# Altium PCB msp430f.PcbDoc (part 2 of 2)
Units mil, origin at the board's own origin, x right, y up, seen from the top; angles counter-clockwise.
Board outline 1930 x 4050 mil, 2 copper layers (Top Layer, Bottom Layer); 52 components, 80 nets, 292 pads, 95 vias.
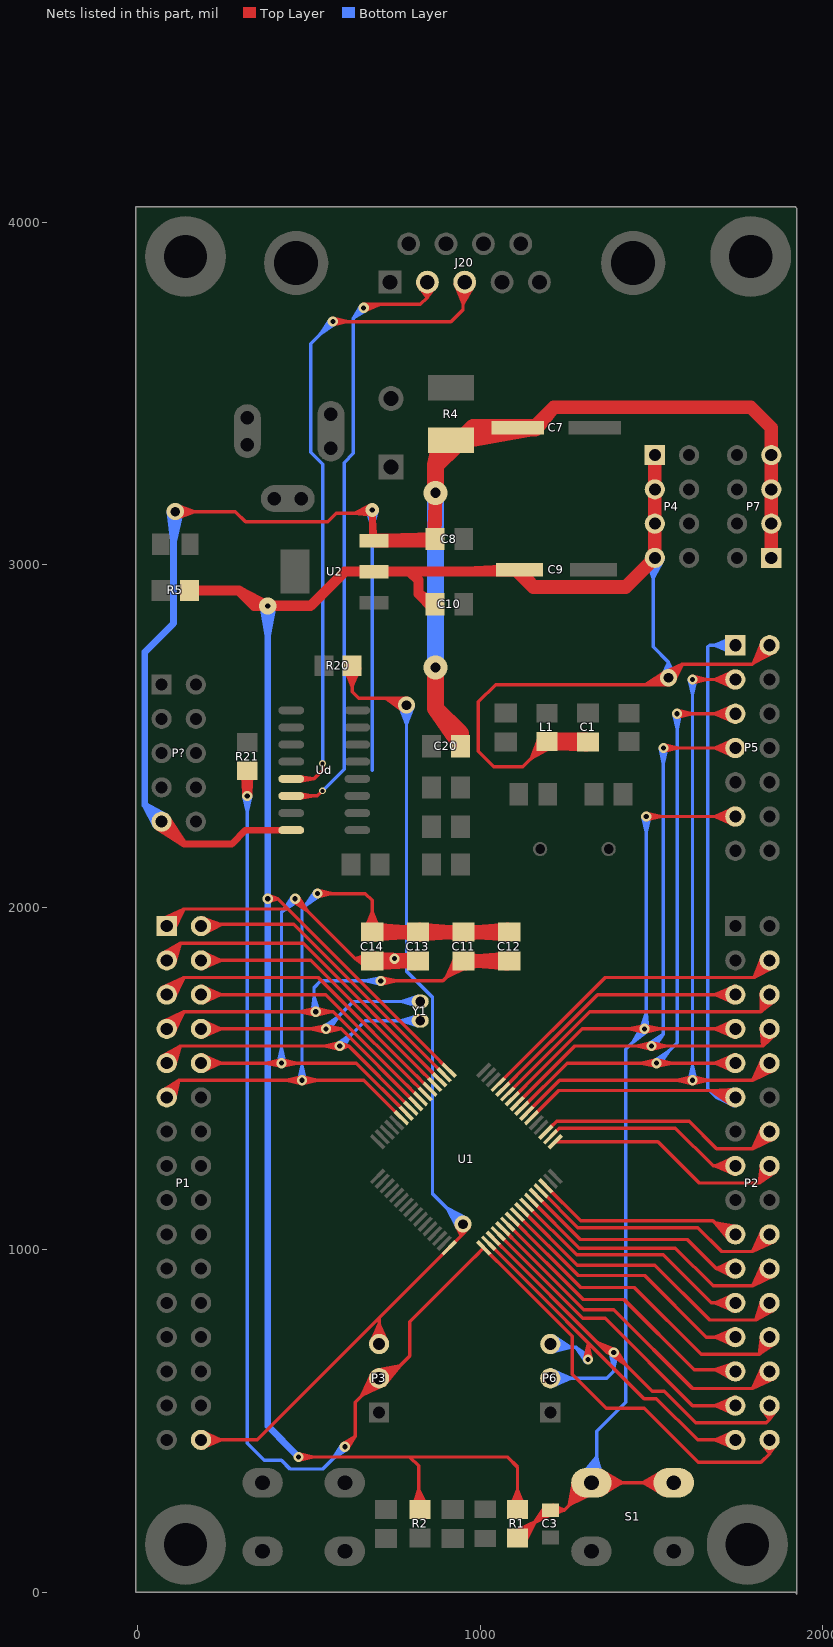
[diagram p2: the nets of this part, all layers, seen from the top]

## Via types
v1: diameter 50, hole 28, Top Layer to Bottom Layer, 43 vias
v2: diameter 30, hole 15, Top Layer to Bottom Layer, 42 vias
v3: diameter 25, hole 15, Top Layer to Bottom Layer, 3 vias
v4: diameter 70, hole 30, Top Layer to Bottom Layer, 2 vias
v5: diameter 20, hole 12, Top Layer to Bottom Layer, 2 vias
v6: diameter 40, hole 15, Top Layer to Bottom Layer, 1 vias
v7: diameter 20, hole 15, Top Layer to Bottom Layer, 1 vias
v8: diameter 50, hole 15, Top Layer to Bottom Layer, 1 vias

## Nets (pads, with @x,y where several pads share a name; then routed paths per layer and width w, separated by ;. In a path a pad name is that pad's centre, name@x,y a point inside that pad or via, vN(x,y) a via of type N, cw(c..) or ccw(c..) an arc to the next point about the centre after c; other vN are vias at no path point) (continued)
P3_4: P1.32 P3.3 R20.2 U1.32 | length 4797.3
  Top Layer w10: P1.32@185,445 244.53,445 ; P1.32@186.77,430.58 244.53,445 ; P1.32@186.77,459.42 244.53,445 ; P1.32@190.05,421 244.53,445 ; P1.32@190.05,469 244.53,445 ; P1.32@195,445 348.79,445 705,801.21 ; R20.2@604.22,2697.63 626.34,2644.49 ; R20.2@613.85,2700.68 626.34,2644.49 ; R20.2@626.34,2702.05 626.34,2644.49 ; R20.2@626.34,2705 626.34,2628.66 645,2610 765,2610 v1(785,2590) 725.09,2610 ; R20.2@638.82,2700.68 626.34,2644.49 ; R20.2@648.46,2697.63 626.34,2644.49 ; P3.3@681,730.05 705,784.53 ; P3.3@690.58,726.77 705,784.53 ; P3.3@705,725 705,801.21 ; P3.3@719.42,726.77 705,784.53 ; P3.3@729,730.05 705,784.53 ; v1@775.74,2572.27 725.09,2610 ; v1@781.09,2580.79 725.09,2610 ; v1@787.41,2599.71 725.09,2610 ; v1@788.25,2609.73 725.09,2610 ; 869.23,965.44 U1.32@894.34,990.55 ; U1.32@909.19,1005.4 705,801.21 ; U1.32@909.36,1005.57 945,1041.21 ; U1.32@924.39,1020.6 945,1041.21 ; v1@930.23,1072.01 945,1041.21 ; v1@940,1075 945,1041.21 ; v1@945,1075 945,1041.21 ; v1(950,1075) 945,1041.21 ; v1@959.57,1072.1 945,1041.21 ; v1@968.06,1066.41 945,1041.21
  Bottom Layer w10: v1@765.33,2586.36 785,2535 ; v1@775.04,2589.09 785,2535 ; v1(785,2590) 785,1813.84 861,1737.84 861,1164 v1(950,1075) ; v1@794.96,2589.09 785,2535 ; v1@804.67,2586.36 785,2535 ; v1@933.86,1063.19 903.79,1121.21 ; v1@942.41,1068.49 903.79,1121.21 ; v1@956.51,1082.59 903.79,1121.21 ; v1@961.81,1091.14 903.79,1121.21
P3_5: P2.32 P3.2 R21.2 U1.33 | length 6568.9
  Top Layer w10: R21.2@297.88,2394.24 320,2341.1 ; R21.2@307.52,2397.29 320,2341.1 ; v2@310.01,2324.67 313.5,2370.36 ; v2@310.06,2326.11 320,2370 v2@329.94,2326.11 ; v2@310.12,2323.43 307.71,2370.63 ; v2@310.32,2327.49 326.5,2370.36 ; v2@310.67,2328.61 332.29,2370.63 ; R21.2@320,2398.66 v2(320,2325) ; v2@329.33,2328.61 307.71,2370.63 ; v2@329.68,2327.49 313.5,2370.36 ; v2@329.88,2323.43 332.29,2370.63 ; v2@329.99,2324.67 326.5,2370.36 ; R21.2@332.48,2397.29 320,2341.1 ; R21.2@342.12,2394.24 320,2341.1 ; v2@598.81,432.86 635,455 ; v2(605,425) 635,455 ; v2@612.86,418.81 635,455 ; P3.2@684.95,639.12 654.26,574.26 ; P3.2@693.74,634.18 654.26,574.26 ; P3.2@696.26,647.92 766.63,661.63 ; P3.2@698.88,638.18 766.63,661.63 ; P3.2@700,620 635,555 635,455 ; P3.2@713.65,613.33 766.63,661.63 ; P3.2@714.18,613.74 654.26,574.26 ; P3.2@719.12,604.95 654.26,574.26 ; P3.2@720.95,606.37 766.63,661.63 ; 985.7,980.3 U1.33@1010.64,1005.57 ; U1.33@1025.66,990.55 1050.77,965.44 ; P2.32@1821.65,437.48 1845,405 ; P2.32@1830.71,442.36 1845,405 ; P2.32@1845,445 1845,405 ; P2.32@1859.29,442.36 1845,405 ; P2.32@1868.35,437.48 1845,405 ; 307.71,2370.63 v2(320,2325) ; v2@310.49,2328.11 320,2341.1 ; v2@310.49,2328.11 320,2341.1 ; v2@310.49,2328.11 320,2341.1 ; v2@310.49,2328.11 320,2341.1 ; 313.5,2370.36 v2(320,2325) ; v2(320,2325) 320,2341.1 ; v2(320,2325) 320,2341.1 ; v2(320,2325) 326.5,2370.36 ; v2(320,2325) 320,2341.1 ; v2(320,2325) 320,2341.1 ; v2(320,2325) 332.29,2370.63 ; 320,2341.1 v2@329.51,2328.11 ; 320,2341.1 v2@329.51,2328.11 ; 320,2341.1 v2@329.51,2328.11 ; 320,2341.1 v2@329.51,2328.11 ; 654.26,574.26 P3.2@705,625 ; P3.2@705,625 766.63,661.63 ; P3.2@705,625 730,625 795,690 795,789.6 1010.81,1005.4 1268.75,747.46 1268.75,636.25 1368.04,536.96 1479.25,536.96 1636.21,380 1820,380 1845,405
  Bottom Layer w10: v2@310.06,2323.89 320,2280 v2@329.94,2323.89 ; v2(320,2325) 320,435 370,385 420,385 445,360 540,360 v2(605,425) ; v2@597.27,431.35 568.79,388.79 v2@611.35,417.27
P3_6: P2.31 P6.3 U1.34 | length 1894.8
  Top Layer w10: U1.34@1024.73,1019.32 1478.29,565.76 1514.24,565.76 1635,445 P2.31@1745,445 ; U1.34@1039.58,1004.46 1064.69,979.36 ; v2@1305.06,681.11 1315,725 v2@1324.94,681.11 ; v2(1315,680) 1315,729.05 ; P2.31@1739.95,421 1685.47,445 ; P2.31@1739.95,469 1685.47,445 ; P2.31@1743.23,430.58 1685.47,445 ; P2.31@1743.23,459.42 1685.47,445
  Bottom Layer w10: P6.3@1204.34,710.49 1265.27,715 ; P6.3@1205,725 1265.27,715 ; P6.3@1205.92,700.49 1265.27,715 ; P6.3@1209.07,738.95 1265.27,715 ; P6.3@1210,715 1280,715 ; P6.3@1213.79,747.9 1265.27,715 ; v2@1307.25,673.68 1280,715 ; v2(1315,680) 1280,715 ; v2@1321.32,687.75 1280,715
P3_7: P2.30 P6.2 U1.35 | length 2223
  Top Layer w10: U1.35@1038.64,1033.24 1371.89,700 ; U1.35@1053.5,1018.38 1078.6,993.28 ; v2@1383.65,692.27 1426.21,663.79 v2@1397.73,706.35 ; v2@1384.01,692 1342.74,729.15 ; v2@1394.46,708.95 1342.74,729.15 ; P2.30@1821.65,537.48 1845,505 ; P2.30@1830.71,542.36 1845,505 ; P2.30@1845,545 1845,505 ; P2.30@1859.29,542.36 1845,505 ; P2.30@1868.35,537.48 1845,505 ; 1342.74,729.15 v2(1390,700) ; 1371.89,700 v2(1390,700) ; 1371.89,700 1387.24,709.61 1371.89,700 ; 1371.89,700 1387.24,690.39 1371.89,700 ; 1371.89,700 v2(1390,700) ; 1371.89,700 v2(1390,700) ; v2(1390,700) 1502.38,587.62 1537.38,587.62 1630,495 1835,495 1845,505
  Bottom Layer w10: P6.2@1205,625 1370,625 1390,645 v2(1390,700) ; P6.2@1206.77,610.58 1264.53,625 ; P6.2@1206.77,639.42 1264.53,625 ; P6.2@1210.05,601 1264.53,625 ; P6.2@1210.05,649 1264.53,625 ; v2@1380.06,698.89 1390,655 v2@1399.94,698.89
P4_0: P2.29 U1.36 | length 1174
  Top Layer w10: U1.36@1052.56,1047.16 1299.73,800 1365,800 1620,545 P2.29@1745,545 ; U1.36@1067.42,1032.3 1092.52,1007.2 ; P2.29@1739.95,521 1685.47,545 ; P2.29@1739.95,569 1685.47,545 ; P2.29@1743.23,530.58 1685.47,545 ; P2.29@1743.23,559.42 1685.47,545
P4_1: P2.28 U1.37 | length 1310.6
  Top Layer w10: U1.37@1066.48,1061.08 1302.56,825 1390,825 1620,595 1795,595 ; U1.37@1081.34,1046.22 1106.44,1021.12 ; P2.28@1824.91,659.07 1795,595 ; P2.28@1833.73,654.16 1795,595 ; P2.28@1845,645 1795,595 ; P2.28@1854.16,633.73 1795,595 ; P2.28@1859.07,624.91 1795,595
P4_2: P2.27 U1.38 | length 1171.3
  Top Layer w10: U1.38@1080.4,1075 1300.4,855 1420,855 1625,650 P2.27@1740,650 ; U1.38@1095.26,1060.14 1120.36,1035.04 ; P2.27@1738.01,621.49 1685.18,650 ; P2.27@1742.01,669.34 1685.18,650 ; P2.27@1742.05,630.78 1685.18,650 ; P2.27@1744.45,659.52 1685.18,650 ; P2.27@1745,645 1685.18,650
P4_3: P2.26 U1.39 | length 1273.3
  Top Layer w10: U1.39@1094.32,1088.92 1293.24,890 1450,890 1645,695 1815,695 ; U1.39@1109.18,1074.06 1134.28,1048.96 ; P2.26@1821.78,752.91 1815,695 ; P2.26@1831.71,750.86 1815,695 ; P2.26@1856.43,736.03 1815,695 ; P2.26@1862.91,728.24 1815,695 ; 1815,695 P2.26@1845,745 1845,725 1815,695
P4_4: P2.25 U1.40 | length 1058.6
  Top Layer w10: U1.40@1108.24,1102.84 1286.08,925 1480,925 1660,745 P2.25@1745,745 ; U1.40@1123.1,1087.98 1148.2,1062.88 ; P2.25@1739.95,721 1685.47,745 ; P2.25@1739.95,769 1685.47,745 ; P2.25@1743.23,730.58 1685.47,745 ; P2.25@1743.23,759.42 1685.47,745
P4_5: P2.24 U1.41 | length 1238.3
  Top Layer w10: U1.41@1122.16,1116.76 1283.92,955 1510,955 1670,795 1805,795 ; U1.41@1137.02,1101.9 1162.12,1076.8 ; P2.24@1823.27,856.37 1805,795 ; P2.24@1832.7,852.73 1805,795 ; P2.24@1855.24,834.7 1805,795 ; P2.24@1860.86,826.29 1805,795 ; 1805,795 P2.24@1845,845 1845,835 1805,795
P4_6: P2.23 U1.42 | length 1060.4
  Top Layer w10: U1.42@1136.08,1130.68 1281.76,985 1535,985 1675,845 P2.23@1745,845 1685.47,845 ; U1.42@1150.94,1115.82 1176.04,1090.72 ; P2.23@1739.95,821 1685.47,845 ; P2.23@1739.95,869 1685.47,845 ; P2.23@1743.23,830.58 1685.47,845 ; P2.23@1743.23,859.42 1685.47,845
P4_7: P2.22 U1.43 | length 1137.4
  Top Layer w10: U1.43@1150,1144.6 1289.6,1005 1570,1005 1680,895 1795,895 ; U1.43@1164.86,1129.74 1189.96,1104.64 ; P2.22@1824.91,959.07 1795,895 ; P2.22@1833.73,954.16 1795,895 ; P2.22@1845,945 1795,895 ; P2.22@1854.16,933.73 1795,895 ; P2.22@1859.07,924.91 1795,895
P5_0: P2.21 U1.44 | length 990
  Top Layer w10: U1.44@1163.92,1158.52 1292.44,1030 1605,1030 1690,945 ; U1.44@1178.78,1143.66 1203.88,1118.56 ; P2.21@1739.53,921.09 1690,945 ; P2.21@1739.53,968.91 1690,945 ; P2.21@1743.08,930.6 1690,945 ; P2.21@1743.08,959.4 1690,945 ; P2.21@1745,945 1690,945 ; P2.21@1755,945 1690,945
P5_1: P2.20 U1.45 | length 1079.7
  Top Layer w10: U1.45@1177.84,1172.44 1285.27,1065 1635,1065 1705,995 1795,995 ; U1.45@1192.7,1157.58 1217.8,1132.48 ; P2.20@1824.91,1059.07 1795,995 ; P2.20@1833.73,1054.16 1795,995 ; P2.20@1845,1045 1795,995 ; P2.20@1854.16,1033.73 1795,995 ; P2.20@1859.07,1024.91 1795,995
P5_2: P2.19 U1.46 | length 966.1
  Top Layer w10: U1.46@1191.76,1186.36 1293.11,1085 1679.8,1085 P2.19@1719.8,1045 ; U1.46@1206.62,1171.5 1231.72,1146.4 ; P2.19@1729.15,1026.28 1685.42,1079.38 ; P2.19@1736.45,1033.25 1685.42,1079.38 ; P2.19@1745,1045 1685.42,1079.38 ; P2.19@1750.89,1058.28 1685.42,1079.38 ; P2.19@1753.28,1068.09 1685.42,1079.38
P5_5: P2.16 U1.49 | length 1037.2
  Top Layer w10: U1.49@1219.43,1315.64 1257.21,1315.81 ; U1.49@1219.6,1315.81 1519.19,1315.81 1640,1195 1815,1195 ; P2.16@1821.78,1252.91 1815,1195 ; P2.16@1831.71,1250.86 1815,1195 ; P2.16@1856.43,1236.03 1815,1195 ; P2.16@1862.91,1228.24 1815,1195 ; 1815,1195 P2.16@1845,1245 1845,1225 1815,1195
P5_6: P2.15 U1.50 | length 848.2
  Top Layer w10: U1.50@1205.68,1329.73 1230.95,1355 ; U1.50@1220.54,1344.58 1230.95,1355 ; P2.15@1739.95,1221 1685.47,1245 ; P2.15@1739.95,1269 1685.47,1245 ; P2.15@1743.23,1230.58 1685.47,1245 ; P2.15@1743.23,1259.42 1685.47,1245 ; P2.15@1745,1245 1680,1245 1570,1355 1230.95,1355
P5_7: P2.14 U1.51 | length 1026.3
  Top Layer w10: U1.51@1191.76,1343.64 1223.11,1375 ; U1.51@1206.62,1358.5 1223.11,1375 ; P2.14@1824.91,1359.07 1795,1295 ; P2.14@1833.73,1354.16 1795,1295 ; P2.14@1845,1345 1795,1295 ; P2.14@1854.16,1333.73 1795,1295 ; P2.14@1859.07,1324.91 1795,1295 ; 1223.11,1375 1610,1375 1690,1295 1795,1295
P6_0: P2.6 U1.59 | length 1214.4
  Top Layer w10: U1.59@1080.4,1455 1320.4,1695 1820,1695 ; U1.59@1095.26,1469.86 1120.36,1494.96 ; P2.6@1821.19,1750.89 1820,1695 ; P2.6@1831.27,1749.75 1820,1695 ; P2.6@1857.04,1736.87 1820,1695 ; P2.6@1864,1729.49 1820,1695 ; 1820,1695 P2.6@1845,1745 1845,1720 1820,1695
P6_1: P2.5 U1.60 | length 1066.5
  Top Layer w10: U1.60@1066.48,1468.92 1342.56,1745 P2.5@1745,1745 ; U1.60@1081.34,1483.78 1106.44,1508.88 ; P2.5@1739.95,1721 1685.47,1745 ; P2.5@1739.95,1769 1685.47,1745 ; P2.5@1743.23,1730.58 1685.47,1745 ; P2.5@1743.23,1759.42 1685.47,1745
P6_2: P2.4 U1.61 | length 1317.2
  Top Layer w10: U1.61@1052.56,1482.84 1364.73,1795 1800,1795 ; U1.61@1067.42,1497.7 1092.52,1522.8 ; P2.4@1824.08,1857.81 1800,1795 ; P2.4@1833.22,1853.5 1800,1795 ; P2.4@1854.69,1834.17 1800,1795 ; P2.4@1859.93,1825.54 1800,1795 ; 1800,1795 P2.4@1845,1845 1845,1840 1800,1795
P6_3: P1.2 U1.2 | length 1237.7
  Top Layer w10: P1.2@175,1950 455.95,1950 U1.2@895.27,1510.68 ; P1.2@185,1945 244.78,1950 ; P1.2@185.55,1959.52 244.78,1950 ; P1.2@187.95,1930.78 244.78,1950 ; P1.2@188,1969.34 244.78,1950 ; P1.2@192,1921.49 244.78,1950 ; 855.31,1550.64 U1.2@880.42,1525.54
P6_4: P1.3 U1.3 | length 1333.5
  Top Layer w10: P1.3@69.14,1863.71 125,1895 ; P1.3@74.76,1855.3 125,1895 ; P1.3@85,1845 125,1895 ; P1.3@85,1855 125,1895 ; P1.3@97.3,1837.27 125,1895 ; P1.3@106.73,1833.63 125,1895 ; 841.4,1536.72 U1.3@866.5,1511.62 ; U1.3@881.36,1496.76 483.11,1895 125,1895
P6_5: P1.4 U1.4 | length 1095.7
  Top Layer w10: P1.4@185,1845 505,1845 U1.4@860,1490 ; P1.4@186.77,1830.58 244.53,1845 ; P1.4@186.77,1859.42 244.53,1845 ; P1.4@190.05,1821 244.53,1845 ; P1.4@190.05,1869 244.53,1845 ; 827.34,1522.66 U1.4@852.58,1497.7
P6_6: P1.5 U1.5 | length 1242.6
  Top Layer w10: P1.5@70.93,1765.09 135,1795 ; P1.5@75.84,1756.27 135,1795 ; P1.5@85,1745 135,1795 ; P1.5@96.27,1735.84 135,1795 ; P1.5@105.09,1730.93 135,1795 ; 813.56,1508.88 U1.5@838.66,1483.78 ; U1.5@853.52,1468.92 527.44,1795 135,1795
P6_7: P1.6 U1.6 | length 1048.3
  Top Layer w10: P1.6@185,1745 549.6,1745 U1.6@839.6,1455 ; P1.6@186.77,1730.58 244.53,1745 ; P1.6@186.77,1759.42 244.53,1745 ; P1.6@190.05,1721 244.53,1745 ; P1.6@190.05,1769 244.53,1745 ; 799.64,1494.96 U1.6@824.74,1469.86
R\S\T\: C3.2 P2.7 P5.11 R1.1 S1.1 U1.58 | length 8078.2
  Top Layer w10: U1.58@1094.32,1441.08 1298.24,1645 P2.7@1745,1645 ; R1.1@1099.19,177.26 1160.94,205.94 ; R1.1@1104.1,168.46 1160.94,205.94 ; R1.1@1109,160 1115,160 1195,240 1245,240 ; U1.58@1109.18,1455.94 1134.28,1481.04 ; R1.1@1111.95,158.66 1160.94,205.94 ; R1.1@1121.47,150.47 1160.94,205.94 ; R1.1@1130.09,145.25 1160.94,205.94 ; C3.2@1188.68,249.84 1157.11,202.11 ; C3.2@1200,240 1157.11,202.11 ; C3.2@1208.37,227.55 1157.11,202.11 ; C3.2@1210,240 1245,240 ; C3.2@1213.21,225.35 1245,240 ; C3.2@1213.21,254.65 1245,240 ; S1.1@1274.12,335.21 1260.48,255.48 ; S1.1@1284.05,332.86 1260.48,255.48 ; S1.1@1293.51,329.32 1260.48,255.48 ; S1.1@1302.4,324.66 1260.48,255.48 ; S1.1@1309.27,320 1260.48,255.48 ; S1.1@1315.63,314.66 1260.48,255.48 ; S1.1@1322.53,307.38 1260.48,255.48 ; S1.1@1328.51,299.24 1260.48,255.48 ; S1.1@1333.49,290.32 1260.48,255.48 ; S1.1@1340.73,320 1414.04,320 ; S1.1@1341.2,311.71 1414.04,320 ; S1.1@1341.2,328.29 1414.04,320 ; S1.1@1343.01,301.84 1414.04,320 ; S1.1@1343.01,338.16 1414.04,320 ; S1.1@1346.19,292.23 1414.04,320 ; S1.1@1346.19,347.77 1414.04,320 ; S1.1@1350.74,283.02 1414.04,320 ; S1.1@1350.74,356.98 1414.04,320 ; v2@1478.89,1635.06 1435,1645 ; v2@1478.89,1654.94 1435,1645 ; v2(1480,1645) 1435,1645 ; v2@1481.11,1635.06 1525,1645 v2@1481.11,1654.94 ; v2(1485,2265) P5.11@1745,2265 ; v2@1486.11,2255.06 1530,2265 v2@1486.11,2274.94 ; S1.1@1539.26,283.02 1475.96,320 ; S1.1@1539.26,356.98 1475.96,320 ; S1.1@1543.81,292.23 1475.96,320 ; S1.1@1543.81,347.77 1475.96,320 ; S1.1@1546.99,301.84 1475.96,320 ; S1.1@1546.99,338.16 1475.96,320 ; S1.1@1548.8,311.71 1475.96,320 ; S1.1@1548.8,328.29 1475.96,320 ; S1.1@1549.27,320 1475.96,320 ; S1.1@1575,320 S1.1@1325,320 1245,240 ; P2.7@1739.95,1621 1685.47,1645 ; P2.7@1739.95,1669 1685.47,1645 ; P5.11@1739.95,2241 1685.47,2265 ; P5.11@1739.95,2289 1685.47,2265 ; P2.7@1743.23,1630.58 1685.47,1645 ; P2.7@1743.23,1659.42 1685.47,1645 ; P5.11@1743.23,2250.58 1685.47,2265 ; P5.11@1743.23,2279.42 1685.47,2265
  Bottom Layer w10: S1.1@1290.55,336.76 1340,394.6 ; S1.1@1298.77,330.64 1340,394.6 ; S1.1@1307.62,325.74 1340,394.6 ; S1.1@1316.96,322.08 1340,394.6 ; S1.1@1325,320 1340,394.6 ; S1.1@1333.22,318.81 1340,394.6 ; S1.1@1340,320 1340,470 1425,555 1425,1585 v2@1475,1635 ; S1.1@1343.25,318.58 1340,394.6 ; S1.1@1353.31,319.68 1340,394.6 ; S1.1@1363.25,322.14 1340,394.6 ; v2@1470.23,1647.14 1485,1691.13 ; v2@1471.84,1650.79 1446.66,1606.66 ; v2@1475.06,2263.89 1485,2220 v2@1494.94,2263.89 ; v2(1485,2265) 1485,1650 v2(1480,1645) ; v2@1486.86,1637.73 1446.66,1606.66 ; v2@1490,1645 1485,1691.13 ; 1446.66,1606.66 v2(1480,1645) ; v2(1480,1645) 1485,1691.13
RXD0: J20.3 Ud.13 | length 2681.5
  Top Layer w10: Ud.13@455,2375 515,2375 ; Ud.13@474.13,2375 515,2375 ; Ud.13@474.7,2368.21 515,2375 ; Ud.13@474.7,2381.79 515,2375 ; v5(540,2420) 540,2400 515,2375 ; v2(570,3710) 915,3710 950,3745 J20.3@950,3825 ; v2@571.11,3700.06 615,3710 v2@571.11,3719.94 ; J20.3@927.03,3820.98 950,3761.68 ; J20.3@936.77,3823.88 950,3761.68 ; J20.3@946.73,3825.19 950,3761.68 ; J20.3@955,3825.08 950,3761.68 ; J20.3@963.18,3823.89 950,3761.68 ; J20.3@972.82,3821.04 950,3761.68 ; J20.3@981.98,3816.65 950,3761.68
  Bottom Layer w10: v5(540,2420) 540,3293.92 505,3328.92 505,3645 v2(570,3710) ; v2@562.27,3716.35 533.79,3673.79 v2@576.35,3702.27
TCK: P2.8 P5.7 U1.57 | length 3210.9
  Top Layer w10: U1.57@1108.24,1427.16 1276.08,1595 1825,1595 ; U1.57@1123.1,1442.02 1148.2,1467.12 ; v2@1498.89,1585.06 1455,1595 v2@1498.89,1604.94 ; v2@1501.11,1585.06 1545,1595 v2@1501.11,1604.94 ; v2(1535,2465) P5.7@1745,2465 ; v2@1536.11,2455.06 1580,2465 v2@1536.11,2474.94 ; P5.7@1739.95,2441 1685.47,2465 ; P5.7@1739.95,2489 1685.47,2465 ; P5.7@1743.23,2450.58 1685.47,2465 ; P5.7@1743.23,2479.42 1685.47,2465 ; P2.8@1820.75,1648.68 1825,1595 ; P2.8@1830.91,1648.53 1825,1595 ; P2.8@1857.64,1637.83 1825,1595 ; P2.8@1865.1,1630.94 1825,1595 ; 1825,1595 P2.8@1845,1645 ; 1825,1595 1845,1615 ; 1845,1615 1830.9,1641.48 1845,1615 ; 1845,1615 1859.1,1641.48 1845,1615 ; 1845,1615 1822.62,1634.97 1845,1615 ; 1845,1615 1867.38,1634.97 1845,1615 ; 1845,1615 P2.8@1845,1645 ; 1845,1615 P2.8@1845,1645
  Bottom Layer w10: v2@1493.68,1602.75 1535,1630 ; v2(1500,1595) 1535,1630 ; v2@1507.75,1588.68 1535,1630 ; v2@1525.06,2463.89 1535,2420 v2@1544.94,2463.89 ; v2(1535,2465) 1535,1630
TDI: P2.10 P5.3 U1.55 | length 3070.7
  Top Layer w10: U1.55@1136.08,1399.32 1231.76,1495 1795,1495 ; U1.55@1150.94,1414.18 1176.04,1439.28 ; v2@1618.89,1485.06 1575,1495 v2@1618.89,1504.94 ; v2(1620,2665) P5.3@1745,2665 ; v2@1621.11,1485.06 1665,1495 v2@1621.11,1504.94 ; v2@1621.11,2655.06 1665,2665 v2@1621.11,2674.94 ; P5.3@1739.95,2641 1685.47,2665 ; P5.3@1739.95,2689 1685.47,2665 ; P5.3@1743.23,2650.58 1685.47,2665 ; P5.3@1743.23,2679.42 1685.47,2665 ; P2.10@1824.91,1559.07 1795,1495 ; P2.10@1833.73,1554.16 1795,1495 ; P2.10@1845,1545 1795,1495 ; P2.10@1854.16,1533.73 1795,1495 ; P2.10@1859.07,1524.91 1795,1495
  Bottom Layer w10: v2@1610.06,1496.11 1620,1540 v2@1629.94,1496.11 ; v2@1610.06,2663.89 1620,2620 v2@1629.94,2663.89 ; v2(1620,1495) v2(1620,2665)
TDO: P2.11 P5.1 U1.54 | length 2961.7
  Top Layer w10: U1.54@1150,1385.4 1229.6,1465 1725,1465 P2.11@1745,1445 1673.88,1465 ; U1.54@1164.86,1400.26 1189.96,1425.36 ; P2.11@1734.53,1422.82 1673.88,1465 ; P2.11@1739.71,1431.47 1673.88,1465 ; P2.11@1747.54,1459.3 1673.88,1465 ; P2.11@1747.63,1469.39 1673.88,1465
  Bottom Layer w10: P2.11@1739.53,1421.09 1690,1445 ; P2.11@1739.53,1468.91 1690,1445 ; P5.1@1739.95,2741 1685.47,2765 ; P5.1@1739.95,2789 1685.47,2765 ; P2.11@1743.08,1430.6 1690,1445 ; P2.11@1743.08,1459.4 1690,1445 ; P5.1@1743.23,2750.58 1685.47,2765 ; P5.1@1743.23,2779.42 1685.47,2765 ; P2.11@1745,1445 1690,1445 ; P5.1@1745,2765 1670,2765 1665,2760 1665,1470 1690,1445
TMS: P2.9 P5.5 U1.56 | length 2866.4
  Top Layer w10: U1.56@1122.16,1413.24 1253.92,1545 P2.9@1745,1545 ; U1.56@1137.02,1428.1 1162.12,1453.2 ; v2@1513.89,1535.06 1470,1545 v2@1513.89,1554.94 ; v2@1516.11,1535.06 1560,1545 v2@1516.11,1554.94 ; v2(1575,2565) P5.5@1745,2565 ; v2@1576.11,2555.06 1620,2565 v2@1576.11,2574.94 ; P2.9@1739.95,1521 1685.47,1545 ; P2.9@1739.95,1569 1685.47,1545 ; P5.5@1739.95,2541 1685.47,2565 ; P5.5@1739.95,2589 1685.47,2565 ; P2.9@1743.23,1530.58 1685.47,1545 ; P2.9@1743.23,1559.42 1685.47,1545 ; P5.5@1743.23,2550.58 1685.47,2565 ; P5.5@1743.23,2579.42 1685.47,2565
  Bottom Layer w10: v2@1508.65,1552.73 1551.21,1581.21 v2@1522.73,1538.65 ; v2(1515,1545) 1575,1605 v2(1575,2565) ; v2@1565.06,2563.89 1575,2520 v2@1584.94,2563.89
TXD0: J20.2 Ud.14 | length 2570.2
  Top Layer w10: Ud.14@474.13,2325 515.94,2325 ; Ud.14@474.69,2318.21 515.94,2325 ; Ud.14@474.69,2331.79 515.94,2325 ; Ud.14@475,2325 525,2325 v5(540,2340) ; v2@658.96,3759.95 707.54,3760 ; v2@660,3745 675,3760 ; v2@663.05,3740.48 707.54,3760 ; J20.2@818.92,3816.78 845,3780 ; J20.2@827.98,3821.75 845,3780 ; J20.2@837.7,3824.49 845,3780 ; J20.2@845,3835 845,3780 ; J20.2@845.94,3825.08 845,3780 ; J20.2@854.16,3824.15 845,3780 ; J20.2@863.75,3821 845,3780 ; J20.2@872.6,3815.66 845,3780 ; v2(660,3750) 675,3760 ; v2(660,3750) 707.54,3760 ; v2(660,3750) 675,3760 ; 675,3760 667.64,3743.54 675,3760 ; 675,3760 656.98,3759.53 675,3760 ; 675,3760 825,3760 845,3780
  Bottom Layer w10: v5(540,2340) 603.39,2403.39 603.39,3298.39 630,3325 630,3720 ; v2@652.14,3756.19 630,3720 ; v2@660,3755 v2(660,3750) 630,3720 ; v2@666.19,3742.14 630,3720
V/VEREF-: C11.1 C12.1 C13.1 C14.1 P1.11 U1.11 | length 8439.6
  Top Layer w10: P1.11@68.14,1462.82 120,1495 ; P1.11@74.17,1454.69 120,1495 ; P1.11@85,1445 120,1495 ; P1.11@85,1460 120,1495 ; P1.11@97.81,1438.14 120,1495 ; P1.11@107.51,1435.26 120,1495 ; v2@478.89,1485.06 435,1495 ; v2@478.89,1504.94 435,1495 ; v2(480,1495) 435,1495 ; v2@481.11,1485.06 525,1495 v2@481.11,1504.94 ; v2(525,2040) 665,2040 685,2020 C14.1@685,1935 ; v2@526.11,2030.06 570,2040 v2@526.11,2049.94 ; C14.1@662.88,1931.74 685,1984.88 ; C14.1@672.52,1928.69 685,1984.88 ; C14.1@685,1927.32 685,1984.88 ; C14.1@697.48,1928.69 685,1984.88 ; C14.1@707.12,1931.74 685,1984.88 ; 730.04,1425.36 U1.11@755.14,1400.26 ; U1.11@770,1385.4 660.4,1495 120,1495
  Top Layer w20: C14.1@685,1925 C12.1@1095,1925 ; C14.1@689.39,1909.77 777.51,1915.9 ; C14.1@689.6,1944.88 781.1,1937.78 ; C14.1@691.17,1909.81 C13.1@813.41,1927.32 ; C14.1@691.17,1944.84 C13.1@813.41,1927.32 ; C14.1@691.22,1909.81 777.55,1925 ; C14.1@692.14,1944.74 777.55,1925 ; C14.1@693.58,1910.15 781.1,1937.78 ; C14.1@693.91,1944.42 777.51,1915.9 ; C13.1@811.19,1944.74 725.81,1925 ; C13.1@812.12,1909.81 725.81,1925 ; C13.1@822.73,1909.77 910.84,1915.9 ; C13.1@822.93,1944.88 914.43,1937.78 ; C13.1@824.5,1909.81 C11.1@946.75,1927.32 ; C13.1@824.5,1944.84 C11.1@946.75,1927.32 ; C13.1@824.55,1909.81 910.88,1925 ; C13.1@825.48,1944.74 910.88,1925 ; C13.1@826.92,1910.15 914.43,1937.78 ; C13.1@827.24,1944.42 910.84,1915.9 ; C11.1@944.52,1944.74 859.12,1925 ; C11.1@945.45,1909.81 859.12,1925 ; C11.1@957.88,1909.81 1044.2,1925 ; C11.1@958.81,1944.74 1044.2,1925 ; C12.1@1076.09,1944.42 992.49,1915.9 ; C12.1@1076.42,1910.15 988.9,1937.78 ; C12.1@1077.86,1944.74 992.47,1925 ; C12.1@1078.78,1909.81 992.47,1925 ; C12.1@1078.83,1909.81 C11.1@956.59,1927.32 ; C12.1@1078.83,1944.84 C11.1@956.59,1927.32 ; C12.1@1080.4,1944.88 988.9,1937.78 ; C12.1@1080.61,1909.77 992.49,1915.9 ; C14.1@689.92,1927.32 725.81,1925 ; C14.1@689.92,1927.32 781.1,1937.78 ; C14.1@689.92,1927.32 725.81,1925 ; C14.1@689.92,1927.32 C13.1@813.41,1927.32 ; C14.1@689.92,1927.32 725.81,1925 ; C14.1@689.92,1927.32 777.51,1915.9 ; C14.1@689.92,1927.32 777.55,1925 ; C14.1@693.1,1910.05 725.81,1925 ; C14.1@693.1,1910.05 725.81,1925 ; C14.1@693.1,1910.05 725.81,1925 ; C14.1@695.3,1944.04 725.81,1925 ; C14.1@695.3,1944.04 725.81,1925 ; C14.1@695.3,1944.04 725.81,1925 ; 725.81,1925 C13.1@813.41,1927.32 ; C13.1@823.25,1927.32 910.88,1925 ; C13.1@823.25,1927.32 859.12,1925 ; C13.1@823.25,1927.32 914.43,1937.78 ; C13.1@823.25,1927.32 859.12,1925 ; C13.1@823.25,1927.32 C11.1@946.75,1927.32 ; C13.1@823.25,1927.32 859.12,1925 ; C13.1@823.25,1927.32 910.84,1915.9 ; C13.1@826.43,1910.05 859.12,1925 ; C13.1@826.43,1910.05 859.12,1925 ; C13.1@826.43,1910.05 859.12,1925 ; C13.1@828.64,1944.04 859.12,1925 ; C13.1@828.64,1944.04 859.12,1925 ; C13.1@828.64,1944.04 859.12,1925 ; 859.12,1925 C11.1@946.75,1927.32 ; C11.1@956.59,1927.32 C12.1@1080.08,1927.32 ; C11.1@956.59,1927.32 1044.2,1925 ; 988.9,1937.78 C12.1@1080.08,1927.32 ; 992.47,1925 C12.1@1080.08,1927.32 ; 992.49,1915.9 C12.1@1080.08,1927.32 ; 1044.2,1925 C12.1@1080.08,1927.32 ; 1044.2,1925 C12.1@1074.7,1944.04 ; 1044.2,1925 C12.1@1076.9,1910.05 ; 1044.2,1925 C12.1@1080.08,1927.32 ; 1044.2,1925 C12.1@1074.7,1944.04 ; 1044.2,1925 C12.1@1076.9,1910.05 ; 1044.2,1925 C12.1@1080.08,1927.32 ; 1044.2,1925 C12.1@1074.7,1944.04 ; 1044.2,1925 C12.1@1076.9,1910.05
  Bottom Layer w10: v2@470.06,1496.11 480,1540 v2@489.94,1496.11 ; v2(480,1495) 480,1995 v2(525,2040) 488.79,2003.79 ; v2@517.27,2046.35 488.79,2003.79 ; v2@531.35,2032.27 488.79,2003.79
VCC: C1.1 C9.1 C10.2 L1.2 P1.1 P4.1 P4.3 P4.5 P4.7 P5.2 R1.2 R2.2 R5.2 U1.1 U2.2 | length 13479.4
  Top Layer w10: P1.1@70.93,1965.09 135,1995 ; P1.1@75.84,1956.27 135,1995 ; P1.1@85,1945 135,1995 ; P1.1@96.27,1935.84 135,1995 ; P1.1@105.09,1930.93 135,1995 ; v2(380,2025) 408.79,2025 ; v2@381.74,2015.15 408.79,2025 ; v2@381.74,2034.85 408.79,2025 ; 438.79,1995 135,1995 ; v2(470,395) 1080,395 1109,366 R1.2@1109,240 ; v2@471.11,385.06 515,395 v2@471.11,404.94 ; 795,395 821,369 R2.2@821,245 ; R2.2@802.62,244.19 821,299.1 ; R2.2@812.45,241.83 821,299.1 ; R2.2@825,241.34 821,299.1 ; R2.2@837.36,243.56 821,299.1 ; R2.2@846.77,247.25 821,299.1 ; 869.23,1564.56 U1.1@894.34,1539.45 ; U1.1@909.19,1524.6 408.79,2025 ; R1.2@1086.88,245.76 1109,298.9 ; R1.2@1096.52,242.71 1109,298.9 ; R1.2@1109,241.34 1109,298.9 ; R1.2@1121.48,242.71 1109,298.9 ; R1.2@1131.12,245.76 1109,298.9 ; L1.2@1172.74,2495.32 1148.72,2433.72 ; L1.2@1181.82,2490.95 1148.72,2433.72 ; L1.2@1192.05,2483.66 1148.72,2433.72 ; L1.2@1195,2483.66 1195,2480 1125,2410 1040,2410 995,2455 995,2600 1045,2650 1535,2650 v1@1550,2665 ; L1.2@1200.71,2474.57 1148.72,2433.72 ; L1.2@1206.32,2466.19 1148.72,2433.72 ; v1@1538.58,2686.42 1590,2710 ; v1@1541.54,2688.12 1483.52,2650 ; v1@1543.58,2677.67 1590,2710 ; v1@1546.44,2679.34 1483.52,2650 ; v1@1552.18,2660.24 1483.52,2650 ; v1@1552.94,2650.22 1483.52,2650 ; v1@1557.67,2663.58 1590,2710 ; v1@1566.42,2658.58 1590,2710 ; P5.2@1824.2,2778 1798.08,2713.08 ; P5.2@1833.27,2773.57 1798.08,2713.08 ; P5.2@1854.71,2754.19 1798.08,2713.08 ; P5.2@1860.03,2745.62 1798.08,2713.08 ; 1483.52,2650 v1(1550,2670) 1590,2710 ; 1590,2710 1795,2710 1845,2760 P5.2@1845,2765 1798.08,2713.08
  Top Layer w25: L1.2@1195,2485 C1.1@1320,2485 ; L1.2@1197.95,2483.66 C1.1@1300.53,2485 ; L1.2@1198.86,2498.69 C1.1@1300.53,2485 ; L1.2@1199.25,2468.66 C1.1@1300.53,2485 ; C1.1@1306.84,2467.97 L1.2@1208.22,2497.43 ; C1.1@1307.15,2497.45 L1.2@1207.66,2470.02 ; C1.1@1308.63,2467.69 L1.2@1207.48,2485 ; C1.1@1308.81,2467.67 L1.2@1207.41,2483.78 ; C1.1@1309.14,2497.71 L1.2@1207.41,2483.78 ; C1.1@1309.31,2497.72 L1.2@1207.48,2485 ; C1.1@1310.83,2467.64 L1.2@1207.66,2470.02 ; C1.1@1311.14,2497.7 L1.2@1208.22,2497.43 ; L1.2@1207.41,2483.78 C1.1@1310.08,2482.68 ; L1.2@1207.48,2485 C1.1@1310.08,2482.68 ; L1.2@1207.66,2470.02 C1.1@1310.08,2482.68 ; L1.2@1208.22,2497.43 C1.1@1310.08,2482.68
  Top Layer w30: R5.2@151.34,2925 295,2925 ; U2.2@667.52,2980 605,2980 ; U2.2@685,2980 605,2980 ; U2.2@690.16,2980 795,2980 ; U2.2@712.8,2980 795,2980 ; C10.2@860,2875 820,2915 ; C10.2@867.68,2889.92 820,2915 ; 955.98,2980 C9.1@1065.79,2985 ; C9.1@1110,2980 795,2980 ; 295,2925 v8(380,2880) ; 295,2925 340,2880 ; 340,2880 v8(380,2880) ; 340,2880 v8(380,2880) ; v8(380,2880) 505,2880 605,2980 ; 795,2980 820,2955 820,2915
  Top Layer w40: C9.1@1110,2980 1155,2935 ; C9.1@1115,2985 1155,2935 ; P4.1@1510,3320 P4.3@1510,3220 P4.5@1510,3120 P4.7@1510,3020 ; 1155,2935 1425,2935 ; 1425,2935 P4.7@1510,3020 ; 1425,2935 P4.7@1510,3020
  Bottom Layer w10: v8(380,2880) v8@380,2885 ; P4.7@1485.66,3017.01 1505,2960.08 ; P4.7@1495.48,3019.45 1505,2960.08 ; P4.7@1505,3015 1505,2760 1550,2715 ; P4.7@1510,3020 1505,2960.08 ; P4.7@1524.23,3017.05 1505,2960.08 ; v1@1530.5,2674.44 1550,2715 ; P4.7@1533.51,3013.02 1505,2960.08 ; v1@1540.06,2671.11 1550,2715 ; v1(1550,2670) 1550,2715 ; v1@1559.94,2671.11 1550,2715 ; v1@1569.5,2674.44 1550,2715
  Bottom Layer w20: v8@365.06,2878.68 380,2795 v8@394.94,2878.68 ; v8(380,2880) v2(380,2025) 380,485 v2(470,395) 412.57,452.43
VCC+5: C7.1 C8.2 C20.2 P7.1 P7.3 P7.5 P7.7 P?.9 R4.2 U2.3 Ud.16 | length 8390.8
  Top Layer w10: v1(110,3155) 165,3155 ; v1@110.91,3145.04 165,3155 ; v1@110.91,3164.96 165,3155 ; v1@113.64,3135.33 165,3155 ; v1@113.64,3174.67 165,3155 ; v1@115,3145 125,3155 285,3155 315,3125 555,3125 580,3150 675,3150 v6(685,3160) 632.13,3150 ; v6@680.18,3174.21 632.13,3150 ; U2.3@685,3080 U2.3@690,3075 ; v6@685.71,3145.02 632.13,3150 ; P7.1@1850,3015 P7.1@1850,3020
  Top Layer w20: P?.9@57.74,2234.8 135,2185 ; P?.9@65,2255 P?.9@70,2250 135,2185 ; P?.9@85.2,2262.26 135,2185 ; 351.14,2225 Ud.16@422.95,2225 ; Ud.16@448.54,2225 315,2225 275,2185 135,2185 ; U2.3@685,3080 v6(685,3160) U2.3@689.55,3080.09 ; v6@685,3151 U2.3@690.16,3070.55
  Top Layer w40: U2.3@690.16,3070.55 860.55,3070.55 865,3075 v4(870,3210) C8.2@867.68,3079.92 ; U2.3@719.78,3070.55 C8.2@867.68,3075 ; C8.2@852.46,3074.54 712.8,3070.55 C8.2@852.48,3070.55 ; C7.1@1155,3400 1215,3460 ; C7.1@1167.09,3400 1215,3460 ; P7.1@1850,3020 P7.3@1850,3120 P7.5@1850,3220 P7.7@1850,3320 1850,3400 1790,3460 1215,3460
  Top Layer w50: v4(870,2700) 870,2580 ; v4(870,3210) 870,3290 ; R4.2@885.47,3363.23 870,3290 ; C20.2@942.32,2470 942.32,2507.68 ; C7.1@1156.8,3400 944.53,3363.23 1052.91,3400 R4.2@980,3400 ; C7.1@1160,3400 R4.2@980,3400 ; 870,2580 C20.2@942.32,2474.92 ; 870,2580 942.32,2507.68 ; 870,3290 929.11,3349.11 R4.2@915,3363.23 943.23,3363.23 R4.2@980,3400 ; C20.2@942.32,2474.92 942.32,2507.68 ; C20.2@942.32,2474.92 942.32,2507.68
  Bottom Layer w10: v6@670.17,3157.75 685,3110 v6@699.83,3157.75 ; 685,2399.41 v6(685,3160)
  Bottom Layer w20: P?.9@54.38,2238.28 21,2299 ; P?.9@81.72,2265.62 21,2299 ; v1@95.01,3154.56 105,3069.47 ; v1@105,3150 105,2829 21,2745 21,2299 ; v1(110,3155) 105,3069.47 ; v1@124.84,3152.82 105,3069.47 ; 21,2299 P?.9@70,2250 21,2299
  Bottom Layer w50: v4(870,2700) 870,2885 ; v4@870,2705 v4(870,3210)
VEREF+: C13.2 C14.2 P1.10 U1.10 | length 6723
  Top Layer w10: P1.10@185,1545 638.24,1545 U1.10@783.92,1399.32 ; P1.10@186.77,1530.58 244.53,1545 ; P1.10@186.77,1559.42 244.53,1545 ; P1.10@190.05,1521 244.53,1545 ; P1.10@190.05,1569 244.53,1545 ; v2@418.89,1535.06 375,1545 ; v2@418.89,1554.94 375,1545 ; v2(420,1545) 375,1545 ; v2@421.11,1535.06 465,1545 v2@421.11,1554.94 ; v2@453.65,2017.27 496.21,1988.79 v2@467.73,2031.35 ; v2(460,2025) 635,1850 ; C14.2@671.07,1821.99 635,1850 ; C14.2@676.38,1830.68 635,1850 ; C14.2@678.08,1865.15 635,1850 ; C14.2@680.08,1842.68 635,1850 ; C14.2@680.37,1855.23 635,1850 ; C14.2@705,1850 635,1850 ; 743.96,1439.28 U1.10@769.06,1414.18
  Top Layer w20: C13.2@825,1850 690,1850 v2(750,1850) ; C14.2@689.92,1842.68 v2(750,1850) ; C14.2@689.92,1842.68 v2(750,1850) ; C14.2@689.92,1842.68 v2(750,1850) ; C14.2@689.92,1842.68 v2(750,1850) ; C14.2@689.92,1842.68 v2(750,1850) ; C14.2@689.92,1842.68 v2(750,1850) ; C14.2@689.92,1842.68 v2(750,1850) ; C14.2@689.92,1842.68 725.47,1850 ; C14.2@689.92,1842.68 776.89,1856 ; C14.2@689.92,1842.68 725.47,1850 ; C14.2@689.92,1842.68 C13.2@813.41,1842.68 ; C14.2@689.92,1842.68 725.47,1850 ; C14.2@689.92,1842.68 C13.2@788.94,1831.58 ; C14.2@689.92,1842.68 778.05,1850 ; C14.2@690.64,1860.22 v2(750,1850) ; C14.2@690.64,1860.22 v2(750,1850) ; C14.2@690.64,1860.22 v2(750,1850) ; C14.2@690.64,1860.22 725.47,1850 ; C14.2@690.64,1860.22 725.47,1850 ; C14.2@690.64,1860.22 725.47,1850 ; C14.2@697.52,1826.85 v2(750,1850) ; C14.2@697.52,1826.85 v2(750,1850) ; C14.2@697.52,1826.85 v2(750,1850) ; C14.2@697.52,1826.85 725.47,1850 ; C14.2@697.52,1826.85 725.47,1850 ; C14.2@697.52,1826.85 725.47,1850 ; 725.47,1850 v2(750,1850) ; 725.47,1850 v2(750,1850) ; 725.47,1850 v2(750,1850) ; 725.47,1850 v2(750,1850) ; 725.47,1850 v2(750,1850) ; 725.47,1850 v2(750,1850) ; 725.47,1850 v2(750,1850) ; 725.47,1850 v2(750,1850) ; 725.47,1850 v2(750,1850) ; 725.47,1850 v2(750,1850) ; 725.47,1850 v2(750,1850) ; 725.47,1850 v2(750,1850) ; 725.47,1850 C13.2@813.41,1842.68 ; 725.47,1850 813.12,1860.23 v2(750,1850) ; 725.47,1850 810.22,1825.41 v2(750,1850) ; v2(750,1850) 694.3,1825.67 776.89,1856 ; v2(750,1850) 776.89,1856 ; v2(750,1850) 693.41,1859.89 C13.2@788.94,1831.58 ; v2(750,1850) C13.2@788.94,1831.58 ; v2(750,1850) 776.89,1856 ; v2(750,1850) 689.01,1860.21 776.89,1856 ; v2(750,1850) 776.89,1856 ; v2(750,1850) 691.17,1860.19 C13.2@813.41,1842.68 ; v2(750,1850) C13.2@813.41,1842.68 ; v2(750,1850) 690.21,1860.23 778.05,1850 ; v2(750,1850) 778.05,1850 ; v2(750,1850) C13.2@813.41,1842.68 ; v2(750,1850) 691.17,1825.16 C13.2@813.41,1842.68 ; v2(750,1850) C13.2@813.41,1842.68 ; v2(750,1850) C13.2@788.94,1831.58 ; v2(750,1850) 689.51,1825.12 C13.2@788.94,1831.58 ; v2(750,1850) C13.2@788.94,1831.58 ; v2(750,1850) 778.05,1850 ; v2(750,1850) 693.11,1825.41 778.05,1850 ; v2(750,1850) 778.05,1850 ; v2(750,1850) C13.2@813.41,1842.68
  Bottom Layer w10: v2@410.06,1546.11 420,1590 v2@429.94,1546.11 ; v2(420,1545) 420,1985 v2(460,2025) ; v2@452.27,2031.35 423.79,1988.79 v2@466.35,2017.27
VREF+: C11.2 C12.2 P1.7 U1.7 | length 4492.2
  Top Layer w10: P1.7@70.93,1665.09 135,1695 ; P1.7@75.84,1656.27 135,1695 ; P1.7@85,1645 135,1695 ; P1.7@96.27,1635.84 135,1695 ; P1.7@105.09,1630.93 135,1695 ; v2@518.89,1685.06 475,1695 ; v2@518.89,1704.94 475,1695 ; v2(520,1695) 475,1695 ; v2@521.11,1685.06 565,1695 v2@521.11,1704.94 ; v2(710,1785) 891.67,1785 C11.2@951.67,1845 ; v2@711.11,1775.06 755,1785 v2@711.11,1794.94 ; 785.72,1481.04 U1.7@810.82,1455.94 ; U1.7@825.68,1441.08 571.76,1695 135,1695 ; C11.2@927.96,1855.17 901.17,1794.51 ; C11.2@936.85,1850.41 901.17,1794.51 ; C11.2@946.75,1842.68 901.17,1794.51 ; C11.2@955.01,1833.22 901.17,1794.51 ; C11.2@960.26,1824.61 901.17,1794.51
  Top Layer w20: C11.2@951.67,1845 C12.2@1085,1845 ; C11.2@957.88,1860.19 1044.19,1845 ; C11.2@958.81,1825.26 1044.19,1845 ; C12.2@1076.09,1825.58 992.49,1854.1 ; C12.2@1076.42,1859.85 988.9,1832.22 ; C12.2@1077.86,1825.26 992.47,1845 ; C12.2@1078.78,1860.19 992.47,1845 ; C12.2@1078.83,1825.16 C11.2@956.59,1842.68 ; C12.2@1078.83,1860.19 C11.2@956.59,1842.68 ; C12.2@1080.4,1825.12 988.9,1832.22 ; C12.2@1080.61,1860.23 992.49,1854.1 ; C11.2@956.59,1842.68 C12.2@1080.08,1842.68 ; C11.2@956.59,1842.68 1044.19,1845 ; 988.9,1832.22 C12.2@1080.08,1842.68 ; 992.47,1845 C12.2@1080.08,1842.68 ; 992.49,1854.1 C12.2@1080.08,1842.68 ; 1044.19,1845 C12.2@1080.08,1842.68 ; 1044.19,1845 C12.2@1076.9,1859.95 ; 1044.19,1845 C12.2@1074.7,1825.96 ; 1044.19,1845 C12.2@1080.08,1842.68 ; 1044.19,1845 C12.2@1076.9,1859.95 ; 1044.19,1845 C12.2@1074.7,1825.96 ; 1044.19,1845 C12.2@1080.08,1842.68 ; 1044.19,1845 C12.2@1076.9,1859.95 ; 1044.19,1845 C12.2@1074.7,1825.96
  Bottom Layer w10: v2@510,1695 515,1740.51 ; v2@515,1695 515,1765 535,1785 v2(710,1785) ; v2(520,1695) 515,1740.51 ; v2@529.76,1697.17 515,1740.51 ; v2@708.89,1775.06 665,1785 v2@708.89,1794.94
XIN: P1.8 U1.8 Y1.1 | length 1774
  Top Layer w10: P1.8@185,1645 593.92,1645 ; P1.8@186.77,1630.58 244.53,1645 ; P1.8@186.77,1659.42 244.53,1645 ; P1.8@190.05,1621 244.53,1645 ; P1.8@190.05,1669 244.53,1645 ; v2@548.89,1635.06 505,1645 ; v2@548.89,1654.94 505,1645 ; v2(550,1645) 505,1645 ; v2@551.14,1635.07 593.92,1645 ; v2@551.14,1654.93 593.92,1645 ; 771.8,1467.12 U1.8@796.9,1442.02 ; U1.8@811.76,1427.16 593.92,1645
  Bottom Layer w10: v2@543.65,1652.73 586.21,1681.21 v2@557.73,1638.65 ; v2(550,1645) 630,1725 Y1.1@825,1725 ; Y1.1@817.75,1710.17 770,1725 ; Y1.1@817.75,1739.83 770,1725 ; Y1.1@820,1725 770,1725
XOUT: P1.9 U1.9 Y1.2 | length 1865.6
  Top Layer w10: P1.9@69.14,1563.71 125,1595 ; P1.9@74.76,1555.3 125,1595 ; P1.9@85,1545 125,1595 ; P1.9@85,1555 125,1595 ; P1.9@97.3,1537.27 125,1595 ; P1.9@106.73,1533.63 125,1595 ; v2@588.89,1585.06 545,1595 ; v2@588.89,1604.94 545,1595 ; v2(590,1595) 545,1595 ; v2@591.92,1585.19 616.08,1595 ; v2@591.92,1604.81 616.08,1595 ; 757.88,1453.2 U1.9@782.98,1428.1 ; U1.9@797.84,1413.24 616.08,1595 ; 125,1595 616.08,1595
  Bottom Layer w10: v2@583.65,1602.73 626.21,1631.21 v2@597.73,1588.65 ; v2(590,1595) 664,1669 Y1.2@825,1669 ; Y1.2@817.75,1654.17 770,1669 ; Y1.2@817.75,1683.83 770,1669 ; Y1.2@820,1669 770,1669
pads on no net: J1.1 J2.1 J3.1 J4.1 J20.1 J20.4 J20.6 J20.7 J20.8 J20.9 P5.4 P5.6 P5.8 P5.10 P5.12 P5.13 P5.14 P?.1 P?.10 U2.4 Ud.7 Ud.8 Ud.9 Ud.10

## Polygon pours and split planes (outlines as drawn)
GND on Bottom Layer "Top Layer-No Net 1" (solid, pour order 14): 5,2075 5,15 1915,15 1920,20 1915,25 1915,2070 0,2070
GND on Bottom Layer "Top Layer-No Net 1" (hatched 90Degree grid 20 track 8, pour order 8): -10,4055 0,4045 0,2060 1930,2060 1915,2075 1915,4050 15,4050 0,4065
GND on Top Layer "Top Layer-No Net 1" (solid, pour order 12): 0,2060 -5,2055 -5,15 1915,15 1930,30 1920,40 1920,2070 5,2070 -5,2080
GND on Top Layer "Top Layer-No Net 1" (hatched 90Degree grid 20 track 8, pour order 10): -5,4055 5,4045 5,2070 1925,2070 1930,2065 1925,2070 1925,4045 5,4045 -5,4055

## Keep-outs
Keep-Out Layer:
  lines w10: 0,0 0,4050 1920,4050 1920,0 0,0

## Silkscreen, mask and mechanical layers (free items; w line width, h text height)
Top Overlay:
  lines w10: 230,1995 600,1995 600,395 235,395 ; 420,395 420,1990 ; 1460,3370 1460,3555 1900,3555 1900,3355 ; 1500,400 1500,1995 ; 1640,3370 1710,3370 ; 1680,3370 1680,3555 ; 1694.75,2765 1645,2765 ; 1695,2713.66 1695,2715 1645,2765 ; 1695,2815 1645,2765 ; 1705,1995 1317.07,1995 1315,1992.93 1315,400 1320,395 1735,395
  lines w40: -15,2065 1905,2065
  text "3.3V" at 1495,3535 h39.37 r270
  text "GND" at 1600,3530 h39.37 r270
  text "GND" at 1735,3530 h39.37 r270
  text "5V" at 1835,3530 h39.37 r270
  text "W5500" at 35,2805 h60
  text "VCC" at 255,1925 h39.37
  text "P6^3" at 440,1925 h39.37
  text "AVCC" at 1330,1920 h39.37
  text "GND" at 1525,1920 h39.37
  text "P6^4" at 255,1825 h39.37
  text "P6^5" at 440,1825 h39.37
  text "AGND" at 1330,1820 h39.37
  text "P6^2" at 1525,1820 h39.37
  text "P6^6" at 255,1725 h39.37
  text "P6^7" at 440,1725 h39.37
  text "P6^1" at 1330,1720 h39.37
  text "P6^0" at 1525,1720 h39.37
  text "ref+" at 255,1625 h39.37
  text "XIN" at 485.92,1625 h39.37
  text "RST" at 1330,1620 h39.37
  text "TCK" at 1525,1620 h39.37
  text "XOUT" at 255,1525 h39.37
  text "ref+" at 446.56,1525 h39.37
  text "TMS" at 1330,1520 h39.37
  text "TDI" at 1525,1520 h39.37
  text "ref-" at 255,1425 h39.37
  text "P1^0" at 446.56,1425 h39.37
  text "TDO" at 1330,1420 h39.37
  text "OSC1" at 1525,1420 h39.37
  text "P1^1" at 255,1325 h39.37
  text "P1^2" at 446.56,1325 h39.37
  text "OSC2" at 1330,1320 h39.37
  text "P5^7" at 1525,1320 h39.37
  text "P1^3" at 255,1225 h39.37
  text "P1^4" at 446.56,1225 h39.37
  text "P5^6" at 1330,1220 h39.37
  text "P5^5" at 1525,1220 h39.37
  text "P1^5" at 255,1125 h39.37
  text "P1^6" at 446.56,1125 h39.37
  text "P5^4" at 1330,1120 h39.37
  text "P5^3" at 1525,1120 h39.37
  text "P1^7" at 255,1025 h39.37
  text "P2^0" at 440,1025 h39.37
  text "P5^2" at 1330,1020 h39.37
  text "P5^1" at 1525,1020 h39.37
  text "P2^1" at 255,925 h39.37
  text "P2^2" at 440,925 h39.37
  text "P5^0" at 1330,920 h39.37
  text "P4^7" at 1525,920 h39.37
  text "P2^3" at 255,825 h39.37
  text "P2^4" at 440,825 h39.37
  text "P4^6" at 1330,820 h39.37
  text "P4^5" at 1525,820 h39.37
  text "P2^5" at 255,725 h39.37
  text "P2^6" at 440,725 h39.37
  text "P4^4" at 1330,720 h39.37
  text "P4^3" at 1525,720 h39.37
  text "TXD0" at 770,715 h39.37
  text "TXD1" at 1005,715 h39.37
  text "P2^7" at 255,625 h39.37
  text "P3^0" at 440,625 h39.37
  text "P4^2" at 1330,620 h39.37
  text "P4^1" at 1525,620 h39.37
  text "RXD1" at 1010,615 h39.37
  text "RXD0" at 780,610 h39.37
  text "P3^1" at 255,525 h39.37
  text "P3^2" at 440,525 h39.37
  text "P4^0" at 1330,520 h39.37
  text "P3^7" at 1525,520 h39.37
  text "GND" at 780,505 h39.37
  text "GND" at 1015,505 h39.37
  text "P3^3" at 255,425 h39.37
  text "P3^4" at 440,425 h39.37
  text "P3^6" at 1330,420 h39.37
  text "P3^5" at 1525,420 h39.37
  text "MSP430" at 865,35 h39.37
  text "KEY" at 445,30 h39.37
  text "RESET" at 1360,25 h39.37

## Dimensions
0,0 to 1920,0 on Mechanical 1
0,4050 to 0,0 on Mechanical 1

## Text inside footprints (layer, text, board x,y; h text height)
C7: Top Overlay "+" at 1131.94,3314.82 h59.06
C9: Top Overlay "+" at 1131.94,2899.82 h39.37
J20: Top Overlay "1" at 727.05,3689.06 h59.06; Top Overlay "5" at 1153.43,3689.06 h59.06; Top Overlay "9" at 1098.9,4059.13 h59.06; Top Overlay "6" at 771.73,4059.13 h59.06
JA: Mechanical 1 "Alert PCB fab to slot details" at 36.26,3628.81 h11.81; Mechanical 1 "Assign keep-out area to slot" at 36.26,3648.5 h11.81; Mechanical 1 "Mech 1 - Slot cut-out" at 36.26,3609.13 h11.81; Mechanical 1 "Mech 2 - Clearance, move to internal plane if present" at 36.26,3589.44 h11.81
P?: Top Overlay "2" at 150,2730 h50 r270; Top Overlay "1" at 50,2730 h50 r270; Top Overlay "9" at 50,2190 h50 r270; Top Overlay "10" at 150,2190 h50 r270
U1: Top Overlay "*" at 890.34,1578.59 h50 r315; Mechanical 13 "*" at 890.34,1578.59 h50 r315
Ud: Mechanical 15 "1" at 527.29,2406.47 h29.53 r270